# Altium PCB PCB1.PcbDoc
Units mm, origin at the board's own origin, x right, y up, seen from the top; angles counter-clockwise.
Board outline 60 x 25 mm, 5 copper layers (Top Layer, Mid-Layer 4, Mid-Layer 9, Mid-Layer 11, Bottom Layer), stack 2.635 mm thick; 3 components, 2 nets, 435 pads, 0 vias.
Unrouted connection lines stored in the file: 17.
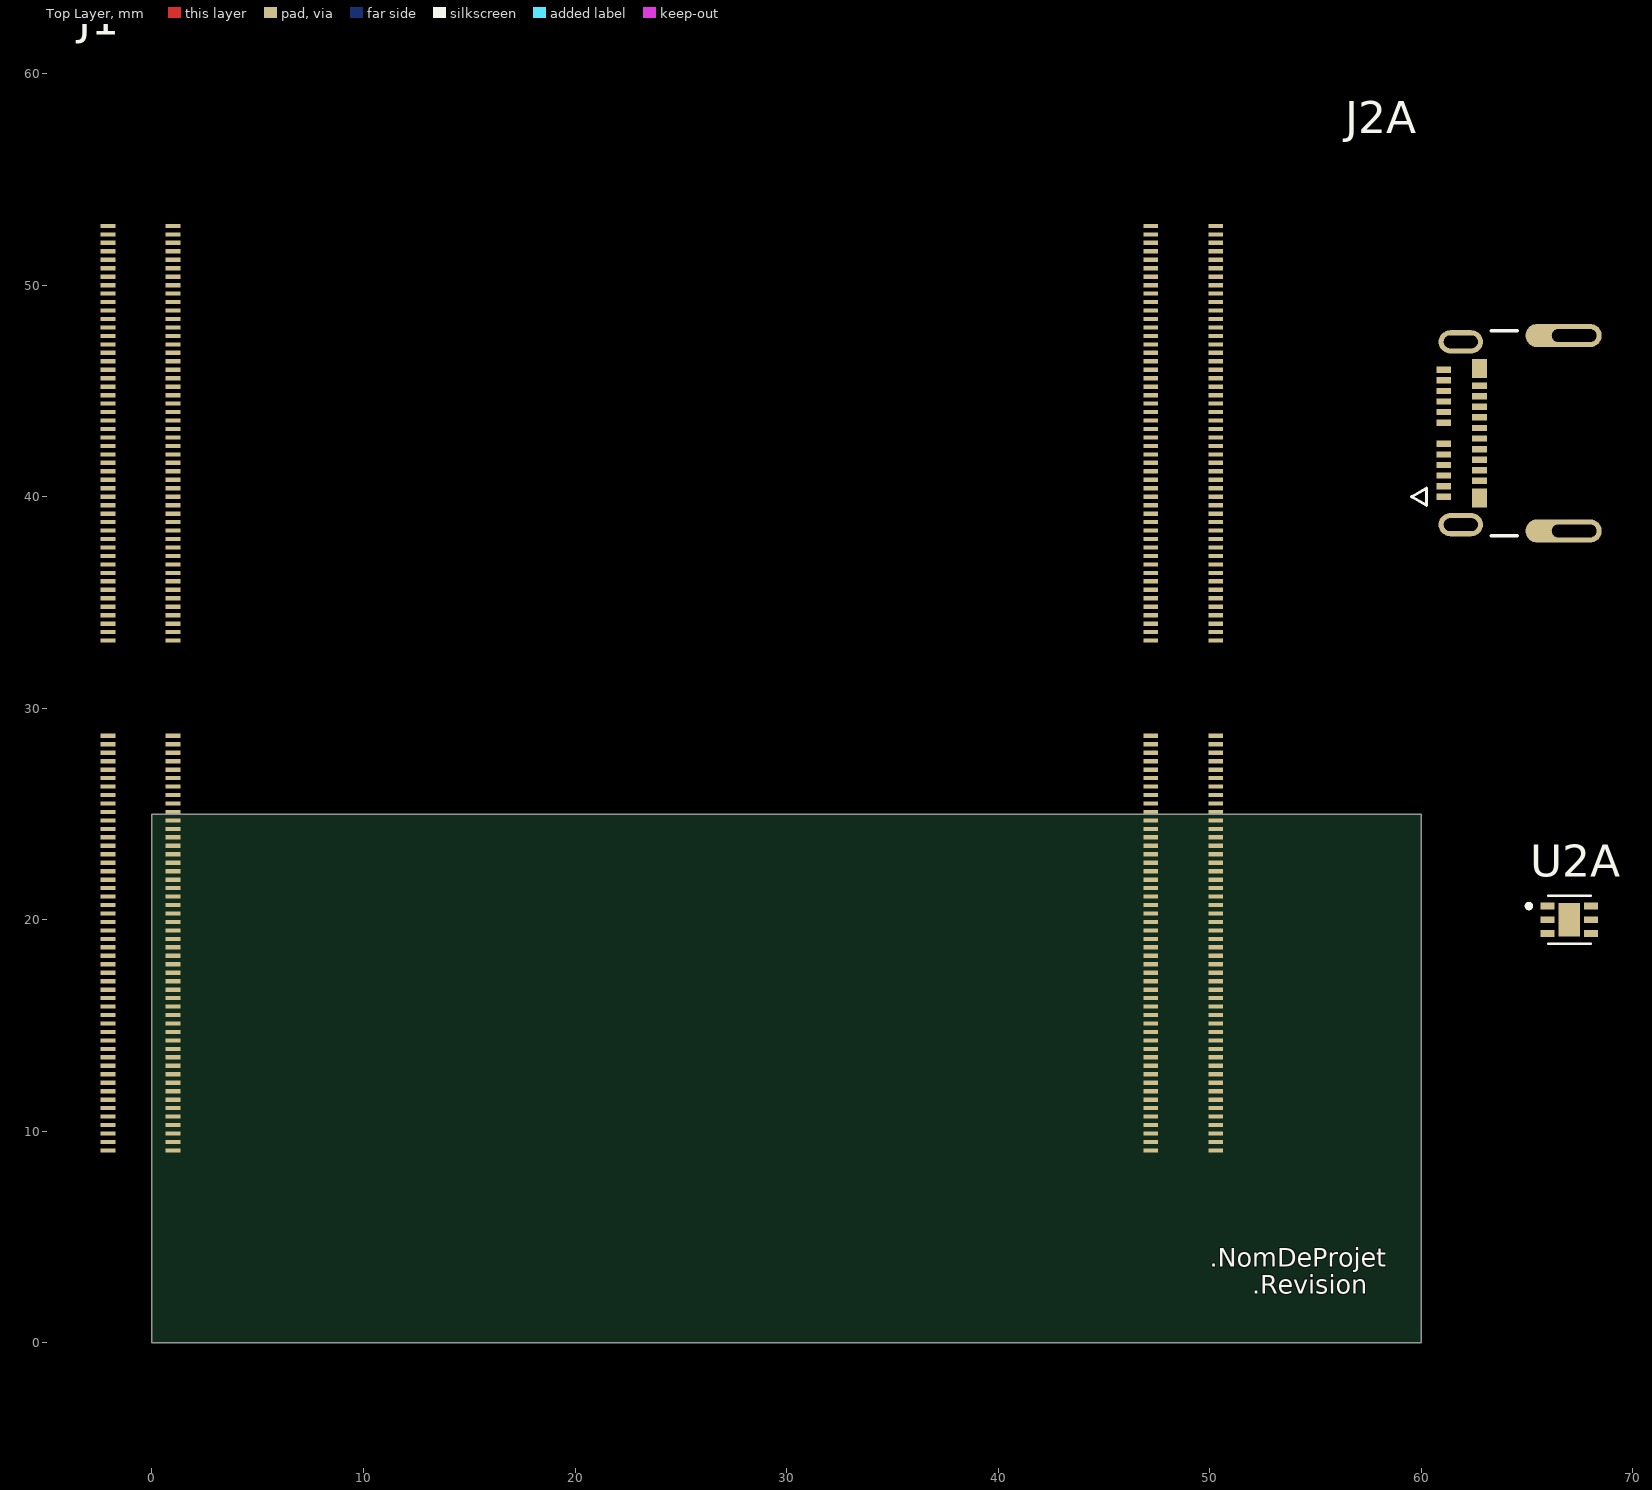
[diagram p0: Top Layer view]
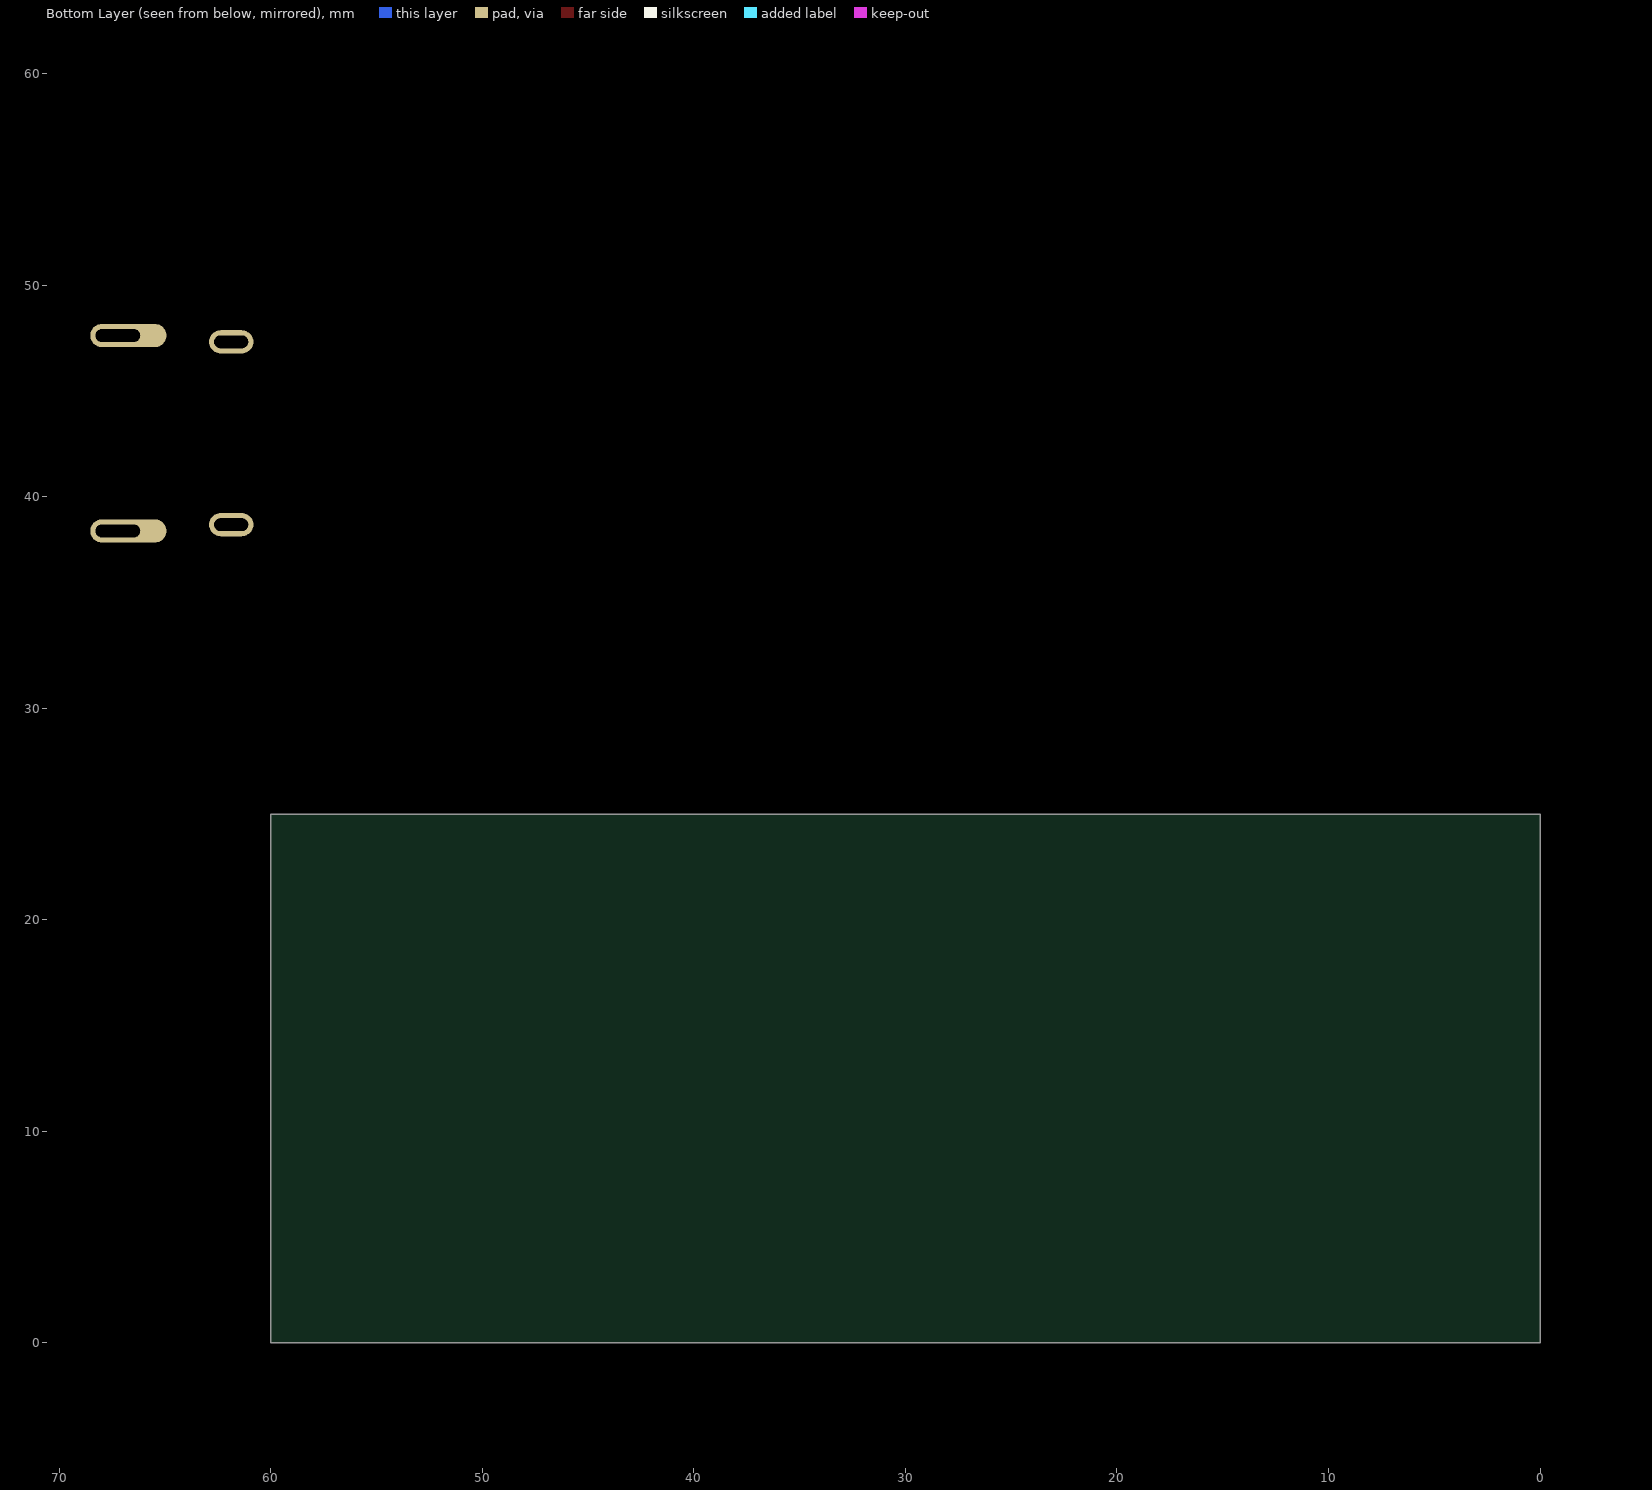
[diagram p1: Bottom Layer view, seen from below]
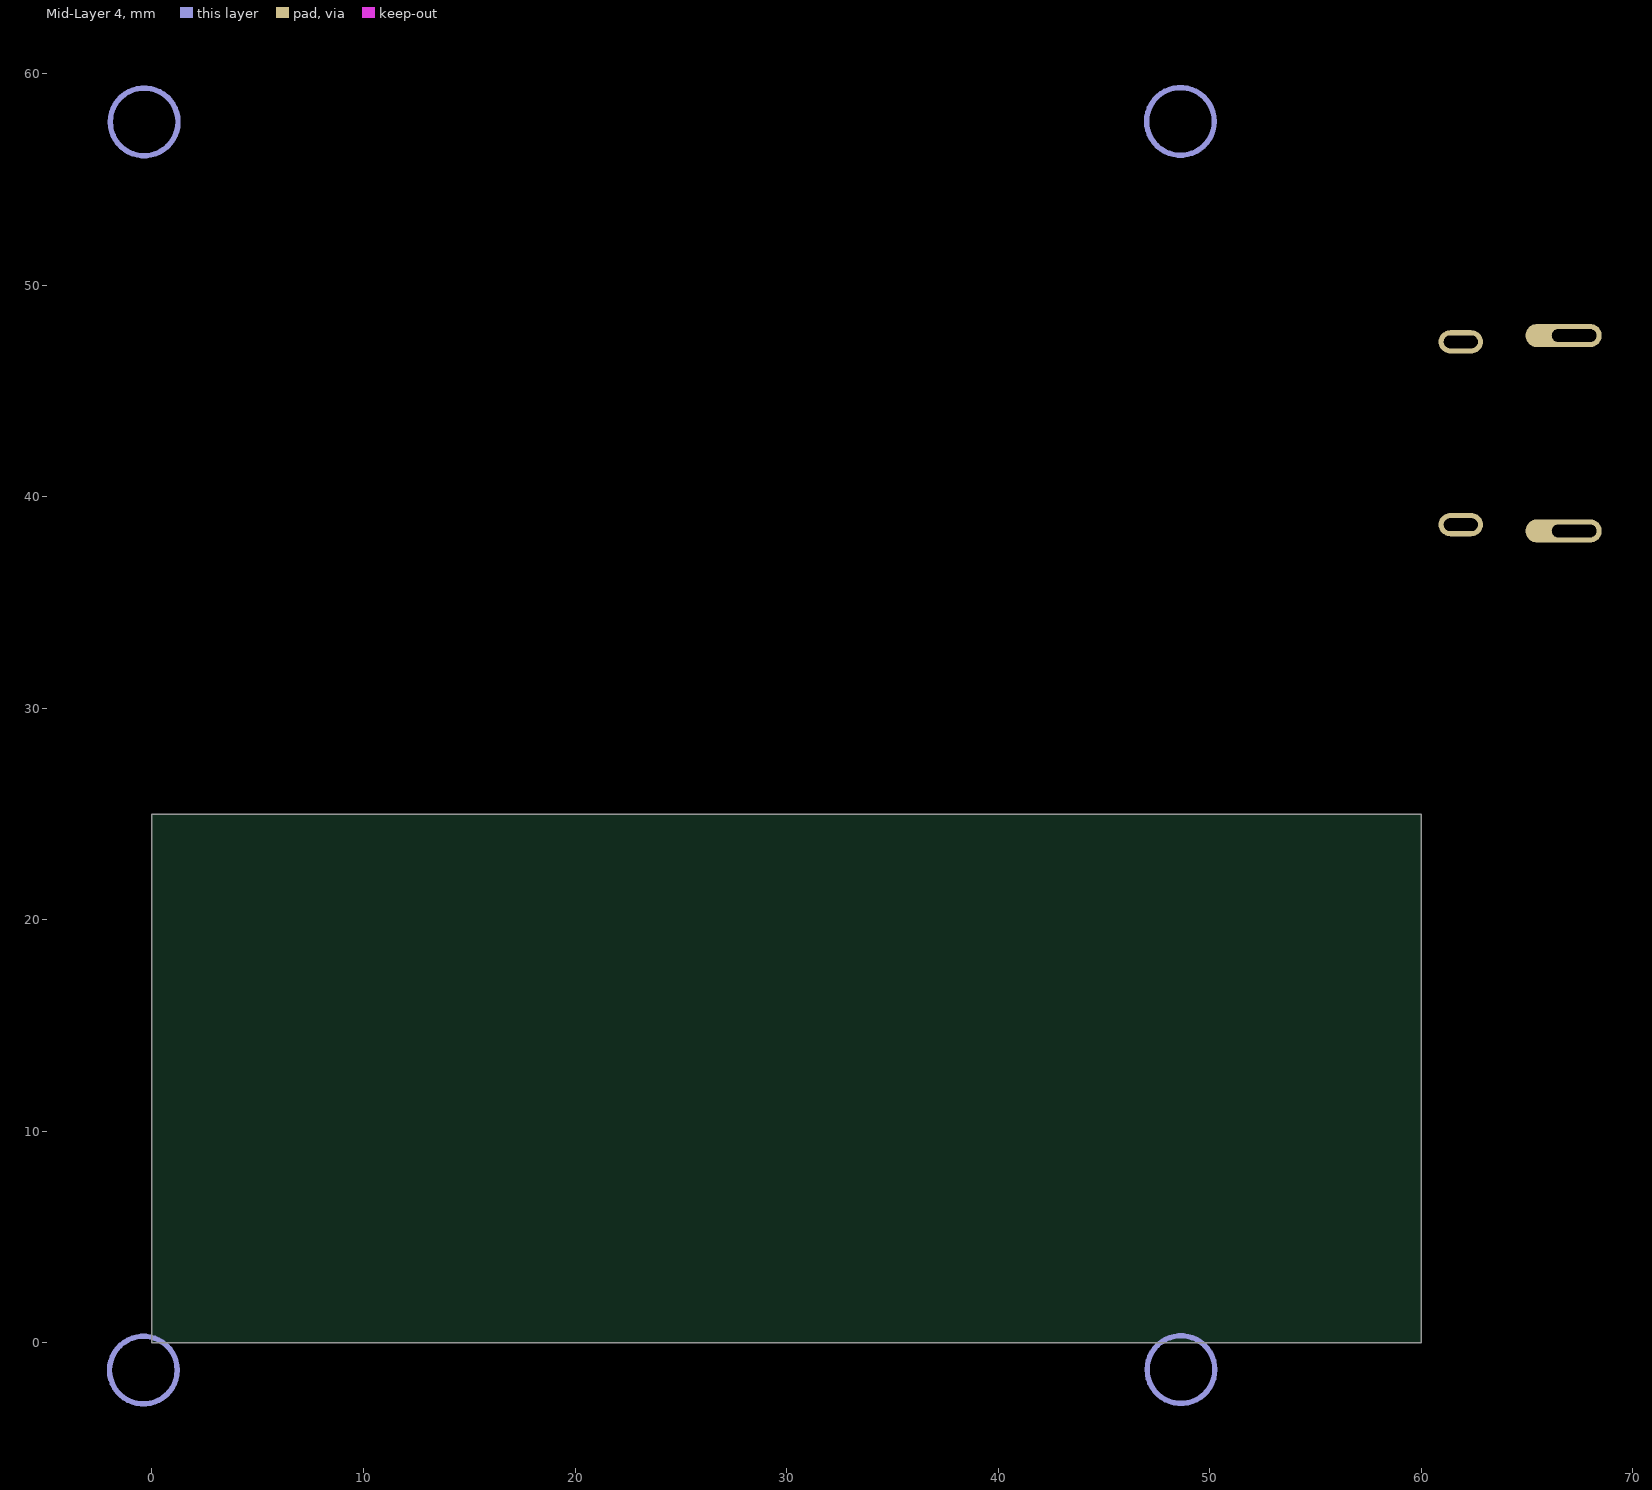
[diagram p2: Mid-Layer 4]
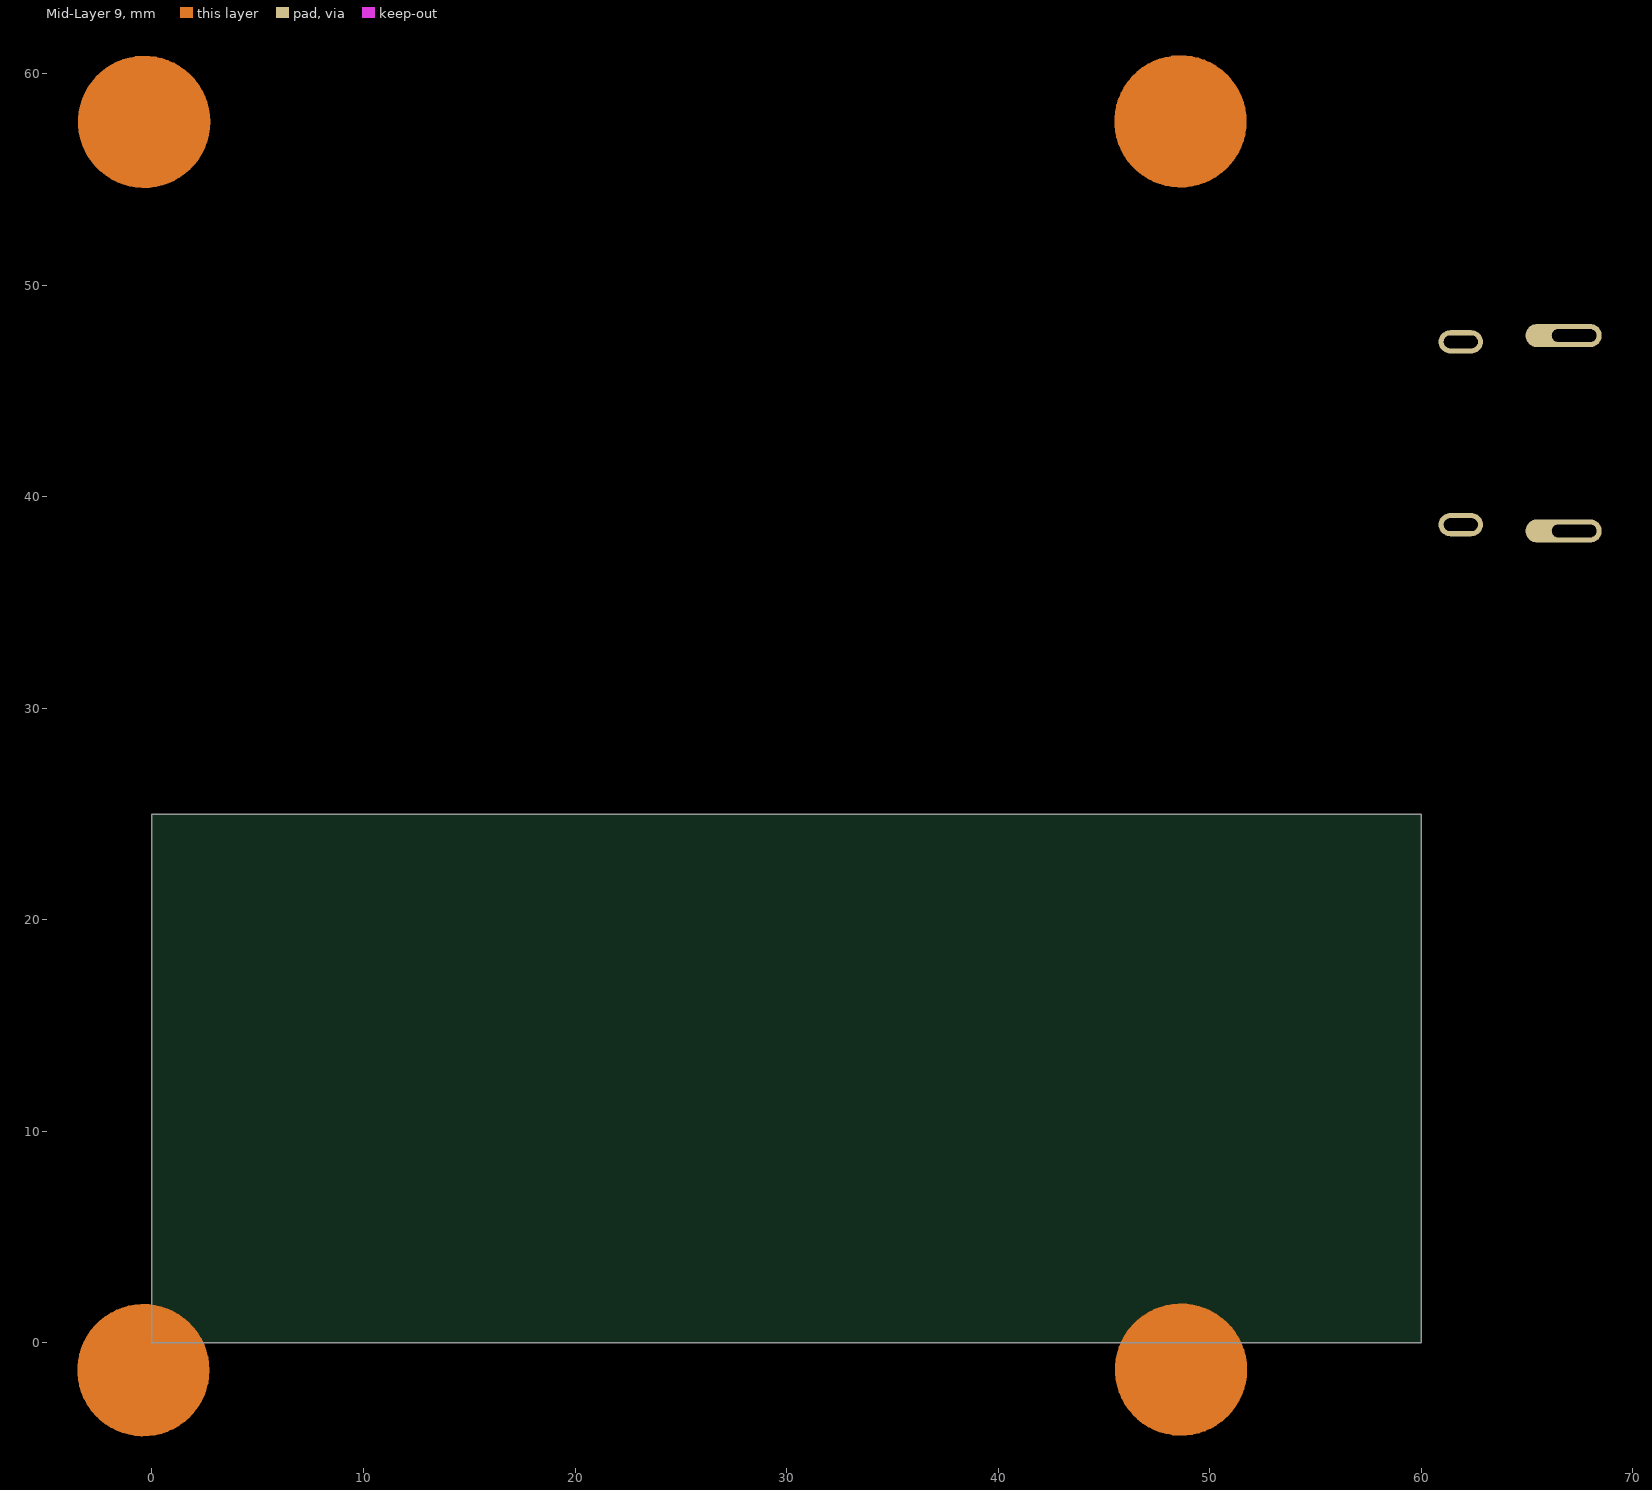
[diagram p3: Mid-Layer 9]
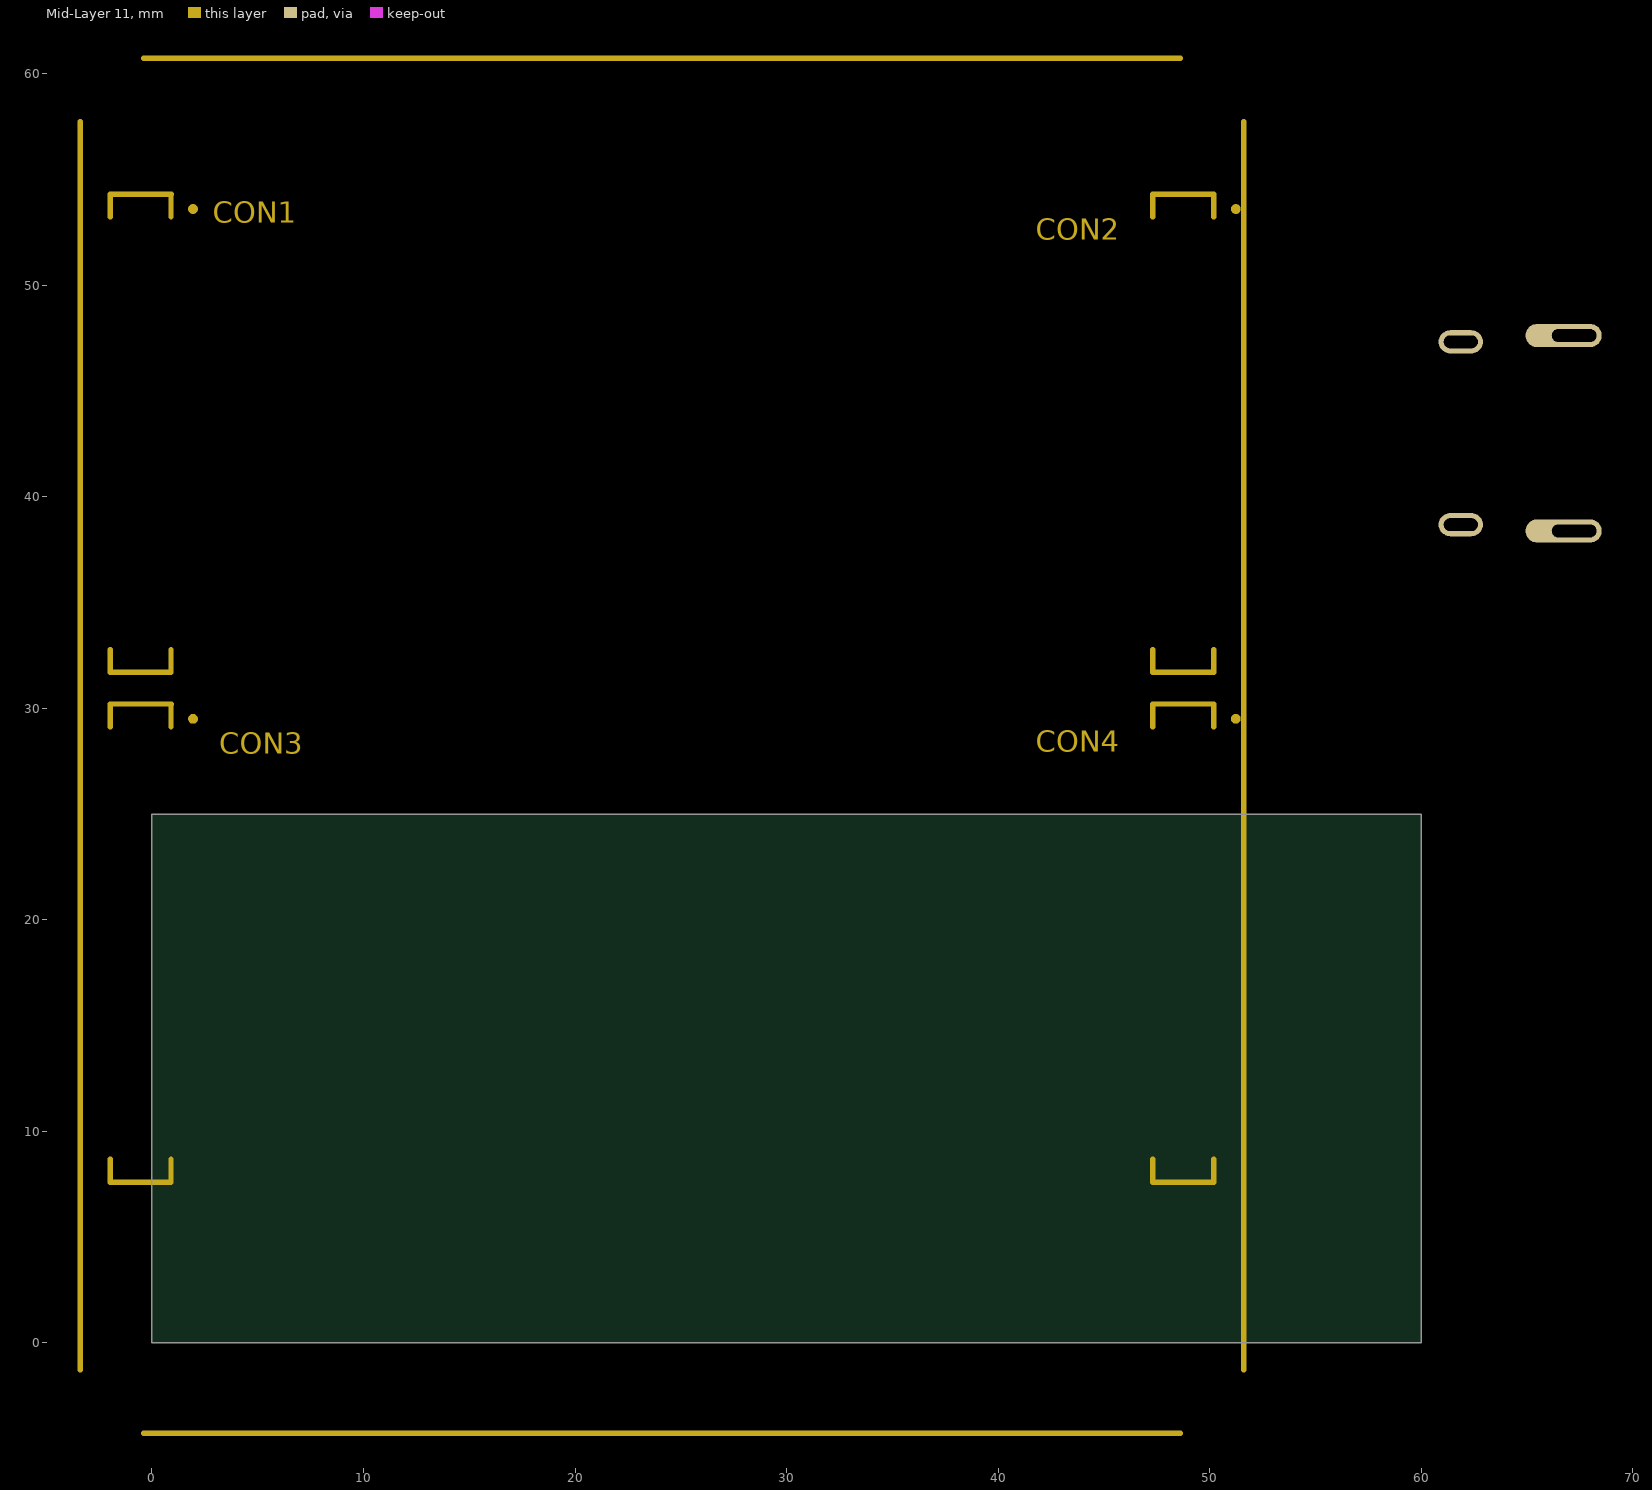
[diagram p4: Mid-Layer 11]

## Layer stack, top to bottom
Top Solder: solder mask 0.0254, SM-001, Dk 4
Top Layer: signal copper 0.035
Dielectric 1: core 1.4986, Core-043, Dk 4.3
Mid-Layer 4: signal copper 0.0356
Dielectric4: dielectric 0.32, FR-4, Dk 4.8
Mid-Layer 9: signal copper 0.0356
Dielectric3: dielectric 0.32, FR-4, Dk 4.8
Mid-Layer 11: signal copper 0.0356
Dielectric2: dielectric 0.32, FR-4, Dk 4.8
Bottom Layer: signal copper 0.035
Bottom Solder: solder mask 0.0254, SM-001, Dk 4

## Board outline
0,0 0,25 60,25 60,0

## Design rules (kind name [scope] priority, off if disabled: settings)
BoardOutlineClearance [All] p1: gap=1 ignorepadtopadclearanceinfootprint=FALSE
Clearance [All] p1: gap=0.2 ignorepadtopadclearanceinfootprint=FALSE
DiffPairsRouting [All] p1: maxlimit=0.125 minlimit=0.125 mostfreqgap=0.125 toplayer_minwidth=0.125 toplayer_maxwidth=0.125 toplayer_prefwidth=0.125 midlayer4_minwidth=0.125 midlayer4_maxwidth=0.125 midlayer4_prefwidth=0.125 midlayer9_minwidth=0.125 midlayer9_maxwidth=0.125 midlayer9_prefwidth=0.125 midlayer11_minwidth=0.125 midlayer11_maxwidth=0.125 midlayer11_prefwidth=0.125 bottomlayer_minwidth=0.125 bottomlayer_maxwidth=0.125 bottomlayer_prefwidth=0.125 maxuncoupledlength=15
HoleSize [All] p1: absolutevalues=TRUE maxlimit=5 minlimit=0.2 maxpercent=80.000 minpercent=20.000
HoleToHoleClearance [All] p1: gap=0.3 allowstackedmicrovias=TRUE
MinimumSolderMaskSliver [All] p1: minsoldermaskwidth=0.075
PlaneClearance [All] p1: clearance=0.5
PlaneConnect [All] p1: pad.planeconnectstyle=Relief pad.reliefexpansion=0.508 pad.reliefentries=4 pad.reliefconductorwidth=0.254 pad.reliefairgap=0.254 via.planeconnectstyle=Direct via.reliefexpansion=0.508 via.reliefentries=4 via.reliefconductorwidth=0.254 via.reliefairgap=0.254
PolygonConnect [All] p1: thpad.connectstyle=Relief thpad.reliefconductorwidth=0.254 thpad.reliefentries=4 thpad.polygonreliefangle="90 Angle" thpad.airgapwidth=0.254 smdpad.connectstyle=Relief smdpad.reliefconductorwidth=0.254 smdpad.reliefentries=4 smdpad.polygonreliefangle="90 Angle" smdpad.airgapwidth=0.254 via.connectstyle=Direct via.reliefconductorwidth=0.254 via.reliefentries=4 via.polygonreliefangle="90 Angle" via.airgapwidth=0.254
RoutingVias [All] p1: holewidth=0.3 width=0.8 viastyle="Through Hole" minholewidth=0.2 minwidth=0.6 maxholewidth=0.7 maxwidth=1.2
SilkToSilkClearance [All] p1: silktosilkclearance=0
SilkToSolderMaskClearance [IsPad] p1: minsilkscreentomaskgap=0 clearancetoexposedcopper=TRUE
SolderMaskExpansion [All] p1: expansion=0.102 istentingtop=FALSE
SupplyNets "Schematic Supply Nets_1" [InNet('GND')] p1: voltage=0.000
SupplyNets "Schematic Supply Nets" [InNet('VCC')] p2: voltage=0.000
Width [All] p1: maxlimit=5 minlimit=0.15 preferedwidth=0.2
22 further rules are at their usual default settings.

## Classes and differential pairs
component class USBC: J2A U2A
component class SYSTEM: J1

## Components (designator, comment, footprint, x,y, rotation, side; value= is the part's Value field where it differs from the comment)
J1 "CM3588 Hirose Connector" CM3588 23.884,30.949 r0 top
J2A "USBC" MOLEX_2012670005 69,43 r90 top
U2A "TVS2200DRVR" SON65P200X200X80-7N 67,20 r0 top

## Footprints (in the part's own frame and the unit in brackets; to place one, negate y for a bottom-side part, rotate by r counter-clockwise, add the part's x,y. Pads: shape width x height; smd on the part's side, far side on the other; paste and mask are expansions set on the pad)
CM3588 [mm]
  rect 0.7x0.2 smd: 1(-22.884,21.851) 2(-25.964,21.851) 3(-22.884,21.451) 4(-25.964,21.451) 5(-22.884,21.051) 6(-25.964,21.051) 7(-22.884,20.651) 8(-25.964,20.651) 9(-22.884,20.251) 10(-25.964,20.251) 11(-22.884,19.851) 12(-25.964,19.851) 13(-22.884,19.451) 14(-25.964,19.451) 15(-22.884,19.051) 16(-25.964,19.051) 17(-22.884,18.651) 18(-25.964,18.651) 19(-22.884,18.251) 20(-25.964,18.251) 21(-22.884,17.851) 22(-25.964,17.851) 23(-22.884,17.451) 24(-25.964,17.451) 25(-22.884,17.051) 26(-25.964,17.051) 27(-22.884,16.651) 28(-25.964,16.651) 29(-22.884,16.251) 30(-25.964,16.251) 31(-22.884,15.851) 32(-25.964,15.851) 33(-22.884,15.451) 34(-25.964,15.451) 35(-22.884,15.051) 36(-25.964,15.051) 37(-22.884,14.651) 38(-25.964,14.651) 39(-22.884,14.251) 40(-25.964,14.251) 41(-22.884,13.851) 42(-25.964,13.851) 43(-22.884,13.451) 44(-25.964,13.451) 45(-22.884,13.051) 46(-25.964,13.051) 47(-22.884,12.651) 48(-25.964,12.651) 49(-22.884,12.251) 50(-25.964,12.251) 51(-22.884,11.851) 52(-25.964,11.851) 53(-22.884,11.451) 54(-25.964,11.451) 55(-22.884,11.051) 56(-25.964,11.051) 57(-22.884,10.651) 58(-25.964,10.651) 59(-22.884,10.251) 60(-25.964,10.251) 61(-22.884,9.851) 62(-25.964,9.851) 63(-22.884,9.451) 64(-25.964,9.451) 65(-22.884,9.051) 66(-25.964,9.051) 67(-22.884,8.651) 68(-25.964,8.651) 69(-22.884,8.251) 70(-25.964,8.251) 71(-22.884,7.851) 72(-25.964,7.851) 73(-22.884,7.451) 74(-25.964,7.451) 75(-22.884,7.051) 76(-25.964,7.051) 77(-22.884,6.651) 78(-25.964,6.651) 79(-22.884,6.251) 80(-25.964,6.251) 81(-22.884,5.851) 82(-25.964,5.851) 83(-22.884,5.451) 84(-25.964,5.451) 85(-22.884,5.051) 86(-25.964,5.051) 87(-22.884,4.651) 88(-25.964,4.651) 89(-22.884,4.251) 90(-25.964,4.251) 91(-22.884,3.851) 92(-25.964,3.851) 93(-22.884,3.451) 94(-25.964,3.451) 95(-22.884,3.051) 96(-25.964,3.051) 97(-22.884,2.651) 98(-25.964,2.651) 99(-22.884,2.251) 100(-25.964,2.251) 101(26.406,21.851) 102(23.326,21.851) 103(26.406,21.451) 104(23.326,21.451) 105(26.406,21.051) 106(23.326,21.051) 107(26.406,20.651) 108(23.326,20.651) 109(26.406,20.251) 110(23.326,20.251) 111(26.406,19.851) 112(23.326,19.851) 113(26.406,19.451) 114(23.326,19.451) 115(26.406,19.051) 116(23.326,19.051) 117(26.406,18.651) 118(23.326,18.651) 119(26.406,18.251) 120(23.326,18.251) 121(26.406,17.851) 122(23.326,17.851) 123(26.406,17.451) 124(23.326,17.451) 125(26.406,17.051) 126(23.326,17.051) 127(26.406,16.651) 128(23.326,16.651) 129(26.406,16.251) 130(23.326,16.251) 131(26.406,15.851) 132(23.326,15.851) 133(26.406,15.451) 134(23.326,15.451) 135(26.406,15.051) 136(23.326,15.051) 137(26.406,14.651) 138(23.326,14.651) 139(26.406,14.251) 140(23.326,14.251) 141(26.406,13.851) 142(23.326,13.851) 143(26.406,13.451) 144(23.326,13.451) 145(26.406,13.051) 146(23.326,13.051) 147(26.406,12.651) 148(23.326,12.651) 149(26.406,12.251) 150(23.326,12.251) 151(26.406,11.851) 152(23.326,11.851) 153(26.406,11.451) 154(23.326,11.451) 155(26.406,11.051) 156(23.326,11.051) 157(26.406,10.651) 158(23.326,10.651) 159(26.406,10.251) 160(23.326,10.251) 161(26.406,9.851) 162(23.326,9.851) 163(26.406,9.451) 164(23.326,9.451) 165(26.406,9.051) 166(23.326,9.051) 167(26.406,8.651) 168(23.326,8.651) 169(26.406,8.251) 170(23.326,8.251) 171(26.406,7.851) 172(23.326,7.851) 173(26.406,7.451) 174(23.326,7.451) 175(26.406,7.051) 176(23.326,7.051) 177(26.406,6.651) 178(23.326,6.651) 179(26.406,6.251) 180(23.326,6.251) 181(26.406,5.851) 182(23.326,5.851) 183(26.406,5.451) 184(23.326,5.451) 185(26.406,5.051) 186(23.326,5.051) 187(26.406,4.651) 188(23.326,4.651) 189(26.406,4.251) 190(23.326,4.251) 191(26.406,3.851) 192(23.326,3.851) 193(26.406,3.451) 194(23.326,3.451) 195(26.406,3.051) 196(23.326,3.051) 197(26.406,2.651) 198(23.326,2.651) 199(26.406,2.251) 200(23.326,2.251) 201(-22.884,-2.251) 202(-25.964,-2.251) 203(-22.884,-2.651) 204(-25.964,-2.651) 205(-22.884,-3.051) 206(-25.964,-3.051) 207(-22.884,-3.451) 208(-25.964,-3.451) 209(-22.884,-3.851) 210(-25.964,-3.851) 211(-22.884,-4.251) 212(-25.964,-4.251) 213(-22.884,-4.651) 214(-25.964,-4.651) 215(-22.884,-5.051) 216(-25.964,-5.051) 217(-22.884,-5.451) 218(-25.964,-5.451) 219(-22.884,-5.851) 220(-25.964,-5.851) 221(-22.884,-6.251) 222(-25.964,-6.251) 223(-22.884,-6.651) 224(-25.964,-6.651) 225(-22.884,-7.051) 226(-25.964,-7.051) 227(-22.884,-7.451) 228(-25.964,-7.451) 229(-22.884,-7.851) 230(-25.964,-7.851) 231(-22.884,-8.251) 232(-25.964,-8.251) 233(-22.884,-8.651) 234(-25.964,-8.651) 235(-22.884,-9.051) 236(-25.964,-9.051) 237(-22.884,-9.451) 238(-25.964,-9.451) 239(-22.884,-9.851) 240(-25.964,-9.851) 241(-22.884,-10.251) 242(-25.964,-10.251) 243(-22.884,-10.651) 244(-25.964,-10.651) 245(-22.884,-11.051) 246(-25.964,-11.051) 247(-22.884,-11.451) 248(-25.964,-11.451) 249(-22.884,-11.851) 250(-25.964,-11.851) 251(-22.884,-12.251) 252(-25.964,-12.251) 253(-22.884,-12.651) 254(-25.964,-12.651) 255(-22.884,-13.051) 256(-25.964,-13.051) 257(-22.884,-13.451) 258(-25.964,-13.451) 259(-22.884,-13.851) 260(-25.964,-13.851) 261(-22.884,-14.251) 262(-25.964,-14.251) 263(-22.884,-14.651) 264(-25.964,-14.651) 265(-22.884,-15.051) 266(-25.964,-15.051) 267(-22.884,-15.451) 268(-25.964,-15.451) 269(-22.884,-15.851) 270(-25.964,-15.851) 271(-22.884,-16.251) 272(-25.964,-16.251) 273(-22.884,-16.651) 274(-25.964,-16.651) 275(-22.884,-17.051) 276(-25.964,-17.051) 277(-22.884,-17.451) 278(-25.964,-17.451) 279(-22.884,-17.851) 280(-25.964,-17.851) 281(-22.884,-18.251) 282(-25.964,-18.251) 283(-22.884,-18.651) 284(-25.964,-18.651) 285(-22.884,-19.051) 286(-25.964,-19.051) 287(-22.884,-19.451) 288(-25.964,-19.451) 289(-22.884,-19.851) 290(-25.964,-19.851) 291(-22.884,-20.251) 292(-25.964,-20.251) 293(-22.884,-20.651) 294(-25.964,-20.651) 295(-22.884,-21.051) 296(-25.964,-21.051) 297(-22.884,-21.451) 298(-25.964,-21.451) 299(-22.884,-21.851) 300(-25.964,-21.851) 301(26.406,-2.251) 302(23.326,-2.251) 303(26.406,-2.651) 304(23.326,-2.651) 305(26.406,-3.051) 306(23.326,-3.051) 307(26.406,-3.451) 308(23.326,-3.451) 309(26.406,-3.851) 310(23.326,-3.851) 311(26.406,-4.251) 312(23.326,-4.251) 313(26.406,-4.651) 314(23.326,-4.651) 315(26.406,-5.051) 316(23.326,-5.051) 317(26.406,-5.451) 318(23.326,-5.451) 319(26.406,-5.851) 320(23.326,-5.851) 321(26.406,-6.251) 322(23.326,-6.251) 323(26.406,-6.651) 324(23.326,-6.651) 325(26.406,-7.051) 326(23.326,-7.051) 327(26.406,-7.451) 328(23.326,-7.451) 329(26.406,-7.851) 330(23.326,-7.851) 331(26.406,-8.251) 332(23.326,-8.251) 333(26.406,-8.651) 334(23.326,-8.651) 335(26.406,-9.051) 336(23.326,-9.051) 337(26.406,-9.451) 338(23.326,-9.451) 339(26.406,-9.851) 340(23.326,-9.851) 341(26.406,-10.251) 342(23.326,-10.251) 343(26.406,-10.651) 344(23.326,-10.651) 345(26.406,-11.051) 346(23.326,-11.051) 347(26.406,-11.451) 348(23.326,-11.451) 349(26.406,-11.851) 350(23.326,-11.851) 351(26.406,-12.251) 352(23.326,-12.251) 353(26.406,-12.651) 354(23.326,-12.651) 355(26.406,-13.051) 356(23.326,-13.051) 357(26.406,-13.451) 358(23.326,-13.451) 359(26.406,-13.851) 360(23.326,-13.851) 361(26.406,-14.251) 362(23.326,-14.251) 363(26.406,-14.651) 364(23.326,-14.651) 365(26.406,-15.051) 366(23.326,-15.051) 367(26.406,-15.451) 368(23.326,-15.451) 369(26.406,-15.851) 370(23.326,-15.851) 371(26.406,-16.251) 372(23.326,-16.251) 373(26.406,-16.651) 374(23.326,-16.651) 375(26.406,-17.051) 376(23.326,-17.051) 377(26.406,-17.451) 378(23.326,-17.451) 379(26.406,-17.851) 380(23.326,-17.851) 381(26.406,-18.251) 382(23.326,-18.251) 383(26.406,-18.651) 384(23.326,-18.651) 385(26.406,-19.051) 386(23.326,-19.051) 387(26.406,-19.451) 388(23.326,-19.451) 389(26.406,-19.851) 390(23.326,-19.851) 391(26.406,-20.251) 392(23.326,-20.251) 393(26.406,-20.651) 394(23.326,-20.651) 395(26.406,-21.051) 396(23.326,-21.051) 397(26.406,-21.451) 398(23.326,-21.451) 399(26.406,-21.851) 400(23.326,-21.851)
  Mid-Layer 4 circle w0.254: c24.758,-32.212 r1.6
  Mid-Layer 4 circle w0.254: c24.733,26.792 r1.6
  Mid-Layer 4 circle w0.254: c-24.255,26.769 r1.6
  Mid-Layer 4 circle w0.254: c-24.289,-32.237 r1.6
  Mid-Layer 9 circle w0.254: c24.758,-32.212 r3
  Mid-Layer 9 circle w0.254: c24.733,26.792 r3
  Mid-Layer 9 circle w0.254: c-24.255,26.769 r3
  Mid-Layer 9 circle w0.254: c-24.289,-32.237 r3
  Mid-Layer 9 region: 25.229,-29.24 25.688,-29.35 26.124,-29.53 26.527,-29.777 26.886,-30.084 27.193,-30.443 27.439,-30.846 27.62,-31.282 27.73,-31.741 27.767,-32.212 27.73,-32.682 27.62,-33.142 27.439,-33.578 27.193,-33.981 26.886,-34.34 26.527,-34.646 26.124,-34.893 25.688,-35.074 25.229,-35.184 24.758,-35.221 24.287,-35.184 23.828,-35.074 23.392,-34.893 22.989,-34.646 22.63,-34.34 22.323,-33.981 22.077,-33.578 21.896,-33.142 21.786,-32.682 21.749,-32.212 21.786,-31.741 21.896,-31.282 22.077,-30.846 22.323,-30.443 22.63,-30.084 22.989,-29.777 23.392,-29.53 23.828,-29.35 24.287,-29.24 24.758,-29.202
  Mid-Layer 9 region: 25.203,29.765 25.662,29.654 26.099,29.474 26.501,29.227 26.86,28.92 27.167,28.561 27.414,28.159 27.595,27.722 27.705,27.263 27.742,26.792 27.705,26.322 27.595,25.863 27.414,25.426 27.167,25.024 26.86,24.665 26.501,24.358 26.099,24.111 25.662,23.93 25.203,23.82 24.733,23.783 24.262,23.82 23.803,23.93 23.366,24.111 22.964,24.358 22.605,24.665 22.298,25.024 22.051,25.426 21.871,25.863 21.76,26.322 21.723,26.792 21.76,27.263 21.871,27.722 22.051,28.159 22.298,28.561 22.605,28.92 22.964,29.227 23.366,29.474 23.803,29.654 24.262,29.765 24.733,29.802
  Mid-Layer 9 region: -23.784,29.741 -23.325,29.631 -22.889,29.45 -22.486,29.203 -22.127,28.896 -21.82,28.537 -21.574,28.135 -21.393,27.698 -21.283,27.239 -21.246,26.769 -21.283,26.298 -21.393,25.839 -21.574,25.402 -21.82,25 -22.127,24.641 -22.486,24.334 -22.889,24.087 -23.325,23.907 -23.784,23.796 -24.255,23.759 -24.726,23.796 -25.185,23.907 -25.621,24.087 -26.024,24.334 -26.383,24.641 -26.69,25 -26.936,25.402 -27.117,25.839 -27.227,26.298 -27.264,26.769 -27.227,27.239 -27.117,27.698 -26.936,28.135 -26.69,28.537 -26.383,28.896 -26.024,29.203 -25.621,29.45 -25.185,29.631 -24.726,29.741 -24.255,29.778
  Mid-Layer 9 region: -23.819,-29.265 -23.36,-29.375 -22.923,-29.556 -22.521,-29.803 -22.162,-30.109 -21.855,-30.468 -21.608,-30.871 -21.427,-31.307 -21.317,-31.766 -21.28,-32.237 -21.317,-32.708 -21.427,-33.167 -21.608,-33.603 -21.855,-34.006 -22.162,-34.365 -22.521,-34.672 -22.923,-34.918 -23.36,-35.099 -23.819,-35.209 -24.289,-35.246 -24.76,-35.209 -25.219,-35.099 -25.656,-34.918 -26.058,-34.672 -26.417,-34.365 -26.724,-34.006 -26.971,-33.603 -27.151,-33.167 -27.262,-32.708 -27.299,-32.237 -27.262,-31.766 -27.151,-31.307 -26.971,-30.871 -26.724,-30.468 -26.417,-30.109 -26.058,-29.803 -25.656,-29.556 -25.219,-29.375 -24.76,-29.265 -24.289,-29.228
  Mid-Layer 11 circle w0.254: c27.346,-1.451 r0.1
  Mid-Layer 11 circle w0.254: c27.346,22.651 r0.1
  Mid-Layer 11 circle w0.254: c-21.944,-1.451 r0.1
  Mid-Layer 11 circle w0.254: c-21.944,22.651 r0.1
  Mid-Layer 11 lines w0.254: -27.27,-32.223 -27.27,26.78 ; -25.864,-22.271 -25.864,-23.351 -22.984,-23.351 -22.984,-22.271 ; -25.864,-1.831 -25.864,-0.751 -22.984,-0.751 -22.984,-1.831 ; -25.864,1.831 -25.864,0.751 -22.984,0.751 -22.984,1.831 ; -25.864,22.271 -25.864,23.351 -22.984,23.351 -22.984,22.271 ; -24.272,-35.221 24.732,-35.221 ; -24.27,29.78 17.784,29.78 ; -22.972,-0.757 -22.972,-0.747 ; -22.972,23.343 -22.972,23.353 ; 17.785,29.781 24.731,29.781 ; 23.426,-22.271 23.426,-23.351 26.306,-23.351 26.306,-22.271 ; 23.426,-1.831 23.426,-0.751 26.306,-0.751 26.306,-1.831 ; 23.426,1.831 23.426,0.751 26.306,0.751 26.306,1.831 ; 23.426,22.271 23.426,23.351 26.306,23.351 26.306,22.271 ; 26.318,-0.758 26.318,-0.748 ; 26.32,23.342 26.32,23.352 ; 27.731,-32.222 27.731,26.782
MOLEX_2012670005 [mm]
  rect 0.298x0.7 smd mask+0.064: A1(-3,7.94) A2(-2.5,7.94) A3(-2,7.94) A4(-1.5,7.94) A5(-1,7.94) A6(-0.5,7.94) A7(0.5,7.94) A8(1,7.94) A9(1.5,7.94) A10(2,7.94) A11(2.5,7.94) A12(3,7.94) B2(2.25,6.24) B3(1.75,6.24) B4(1.25,6.24) B5(0.75,6.24) B6(0.25,6.24) B7(-0.25,6.24) B8(-0.75,6.24) B9(-1.25,6.24) B10(-1.75,6.24) B11(-2.25,6.24)
  rect 0.898x0.7 smd mask+0: B1(3.05,6.24) B12(-3.05,6.24)
  oval 1.1x2.1 hole 0.6 slot 1.6 at 90 deg mask+0.064: SH1(-4.32,7.13) SH2(4.32,7.13)
  oval 1.1x3.6 hole 0.6 slot 2.1 at 90 deg copper offset 0,0.5 mask+0.064: SH3(-4.62,1.77) SH4(4.62,1.77)
  silkscreen extent -4.84,4.45 4.84,9.45
SON65P200X200X80-7N [mm]
  rect 0.66x0.32 smd: 1(-1.025,0.65) 2(-1.025,0) 3(-1.025,-0.65) 4(1.025,-0.65) 5(1.025,0) 6(1.025,0.65)
  rect 1x1.6 smd paste-2: 7(0,0)
  silkscreen extent -2.01,-1.13 1,1.13, body extent -1,-1 1,1, height 0.8

## Part data
J1: library part CM3588, LCSC=C597931
J2A: "USB-C (USB TYPE-C) USB 3.2 Gen 2 (USB 3.1 Gen 2, Superspeed + (USB 3.1)) Receptacle Connector 24 Position Surface Mount, Right Angle; Through Hole", Package=None, Check_prices=https://www.snapeda.com/parts/2012670005/Molex/view-part/?ref=eda, MF=Molex, MP=2012670005, SnapEDA_Link=https://www.snapeda.com/parts/2012670005/Molex/view-part/?ref=snap
U2A: "22V flat-clamp surge protection device", Package="WSON-6 Texas Instruments", Check_prices=https://www.snapeda.com/parts/TVS2200DRVR/Texas+Instruments/view-part/?ref=eda, MF="Texas Instruments", MP=TVS2200DRVR, SnapEDA_Link=https://www.snapeda.com/parts/TVS2200DRVR/Texas+Instruments/view-part/?ref=snap

## Nets (pads, with @x,y where several pads share a name; then routed paths per layer and width w, separated by ;. In a path a pad name is that pad's centre, name@x,y a point inside that pad or via, vN(x,y) a via of type N, cw(c..) or ccw(c..) an arc to the next point about the centre after c; other vN are vias at no path point)
GND: J2A.A1 J2A.A12 J2A.B1 J2A.B12 J2A.SH1 J2A.SH2 J2A.SH3 J2A.SH4 U2A.1 U2A.2 U2A.3 U2A.7
VCC: J2A.A4 J2A.A9 J2A.B4 J2A.B9 U2A.4 U2A.5 U2A.6
pads on no net: J1.1 J1.2 J1.3 J1.4 J1.5 J1.6 J1.7 J1.8 J1.9 J1.10 J1.11 J1.12 J1.13 J1.14 J1.15 J1.16 J1.17 J1.18 J1.19 J1.20 J1.21 J1.22 J1.23 J1.24 J1.25 J1.26 J1.27 J1.28 J1.29 J1.30 J1.31 J1.32 J1.33 J1.34 J1.35 J1.36 J1.37 J1.38 J1.39 J1.40 J1.41 J1.42 J1.43 J1.44 J1.45 J1.46 J1.47 J1.48 J1.49 J1.50 J1.51 J1.52 J1.53 J1.54 J1.55 J1.56 J1.57 J1.58 J1.59 J1.60 J1.61 J1.62 J1.63 J1.64 J1.65 J1.66 J1.67 J1.68 J1.69 J1.70 J1.71 J1.72 J1.73 J1.74 J1.75 J1.76 J1.77 J1.78 J1.79 J1.80 J1.81 J1.82 J1.83 J1.84 J1.85 J1.86 J1.87 J1.88 J1.89 J1.90 J1.91 J1.92 J1.93 J1.94 J1.95 J1.96 J1.97 J1.98 J1.99 J1.100 J1.101 J1.102 J1.103 J1.104 J1.105 J1.106 J1.107 J1.108 J1.109 J1.110 J1.111 J1.112 J1.113 J1.114 J1.115 J1.116 J1.117 J1.118 J1.119 J1.120 J1.121 J1.122 J1.123 J1.124 J1.125 J1.126 J1.127 J1.128 J1.129 J1.130 J1.131 J1.132 J1.133 J1.134 J1.135 J1.136 J1.137 J1.138 J1.139 J1.140 J1.141 J1.142 J1.143 J1.144 J1.145 J1.146 J1.147 J1.148 J1.149 J1.150 J1.151 J1.152 J1.153 J1.154 J1.155 J1.156 J1.157 J1.158 J1.159 J1.160 J1.161 J1.162 J1.163 J1.164 J1.165 J1.166 J1.167 J1.168 J1.169 J1.170 J1.171 J1.172 J1.173 J1.174 J1.175 J1.176 J1.177 J1.178 J1.179 J1.180 J1.181 J1.182 J1.183 J1.184 J1.185 J1.186 J1.187 J1.188 J1.189 J1.190 J1.191 J1.192 J1.193 J1.194 J1.195 J1.196 J1.197 J1.198 J1.199 J1.200 J1.201 J1.202 J1.203 J1.204 J1.205 J1.206 J1.207 J1.208 J1.209 J1.210 J1.211 J1.212 J1.213 J1.214 J1.215 J1.216 J1.217 J1.218 J1.219 J1.220 J1.221 J1.222 J1.223 J1.224 J1.225 J1.226 J1.227 J1.228 J1.229 J1.230 J1.231 J1.232 J1.233 J1.234 J1.235 J1.236 J1.237 J1.238 J1.239 J1.240 J1.241 J1.242 J1.243 J1.244 J1.245 J1.246 J1.247 J1.248 J1.249 J1.250 J1.251 J1.252 J1.253 J1.254 J1.255 J1.256 J1.257 J1.258 J1.259 J1.260 J1.261 J1.262 J1.263 J1.264 J1.265 J1.266 J1.267 J1.268 J1.269 J1.270 J1.271 J1.272 J1.273 J1.274 J1.275 J1.276 J1.277 J1.278 J1.279 J1.280 J1.281 J1.282 J1.283 J1.284 J1.285 J1.286 J1.287 J1.288 J1.289 J1.290 J1.291 J1.292 J1.293 J1.294 J1.295 J1.296 J1.297 J1.298 J1.299 J1.300 J1.301 J1.302 J1.303 J1.304 J1.305 J1.306 J1.307 J1.308 J1.309 J1.310 J1.311 J1.312 J1.313 J1.314 J1.315 J1.316 J1.317 J1.318 J1.319 J1.320 J1.321 J1.322 J1.323 J1.324 J1.325 J1.326 J1.327 J1.328 J1.329 J1.330 J1.331 J1.332 J1.333 J1.334 J1.335 J1.336 J1.337 J1.338 J1.339 J1.340 J1.341 J1.342 J1.343 J1.344 J1.345 J1.346 J1.347 J1.348 J1.349 J1.350 J1.351 J1.352 J1.353 J1.354 J1.355 J1.356 J1.357 J1.358 J1.359 J1.360 J1.361 J1.362 J1.363 J1.364 J1.365 J1.366 J1.367 J1.368 J1.369 J1.370 J1.371 J1.372 J1.373 J1.374 J1.375 J1.376 J1.377 J1.378 J1.379 J1.380 J1.381 J1.382 J1.383 J1.384 J1.385 J1.386 J1.387 J1.388 J1.389 J1.390 J1.391 J1.392 J1.393 J1.394 J1.395 J1.396 J1.397 J1.398 J1.399 J1.400 J2A.A2 J2A.A3 J2A.A5 J2A.A6 J2A.A7 J2A.A8 J2A.A10 J2A.A11 J2A.B2 J2A.B3 J2A.B5 J2A.B6 J2A.B7 J2A.B8 J2A.B10 J2A.B11

## Silkscreen, mask and mechanical layers (free items; w line width, h text height)
Top Overlay:
  text ".NomDeProjet" at 50,3.282 h1.5
  text ".Revision" at 52,2.017 h1.5
Board:
  lines w0.2: 0,0 0,25 35,25 60,25 60,0 0,0
Drill Drawing:
  circle w0.254: c5.066,-5.409 r0.69
  lines w0.25: 3.125,-10.133 94.792,-10.133 ; 3.125,-3.927 94.792,-3.927 ; 11.106,-13.236 11.106,-0.824 ; 17.174,-13.236 17.174,-0.824 ; 30.863,-13.236 30.863,-0.824 ; 37.052,-13.236 37.052,-0.824 ; 46.063,-13.236 46.063,-0.824 ; 63.125,-13.236 63.125,-0.824 ; 70.509,-13.236 70.509,-0.824 ; 73.125,1.267 79.401,1.267 95.409,1.267 104.367,1.267 111.489,1.267 ; 73.125,4.267 79.401,4.267 95.409,4.267 104.367,4.267 111.489,4.267 ; 73.125,7.267 79.401,7.267 95.409,7.267 104.367,7.267 111.489,7.267 ; 73.125,10.267 79.401,10.267 95.409,10.267 104.367,10.267 111.489,10.267 ; 73.125,13.267 79.401,13.267 95.409,13.267 104.367,13.267 111.489,13.267 ; 73.125,16.267 79.401,16.267 95.409,16.267 104.367,16.267 111.489,16.267 ; 73.125,19.267 79.401,19.267 95.409,19.267 104.367,19.267 111.489,19.267 ; 73.125,22.267 79.401,22.267 95.409,22.267 104.367,22.267 111.489,22.267 ; 73.125,25.267 79.401,25.267 95.409,25.267 104.367,25.267 111.489,25.267 ; 73.125,28.267 79.401,28.267 95.409,28.267 104.367,28.267 111.489,28.267 ; 73.125,31.267 79.401,31.267 95.409,31.267 104.367,31.267 111.489,31.267 ; 73.125,34.267 79.401,34.267 95.409,34.267 104.367,34.267 111.489,34.267 ; 73.125,37.267 79.401,37.267 95.409,37.267 104.367,37.267 111.489,37.267 ; 73.125,40.267 79.401,40.267 95.409,40.267 104.367,40.267 111.489,40.267 ; 73.125,43.267 111.489,43.267 ; 79.401,46.267 79.401,-1.733 ; 80.155,-13.236 80.155,-0.824 ; 95.409,46.267 95.409,-1.733 ; 104.367,46.267 104.367,-1.733 ; 79.401,-1.733 73.125,-1.733 73.125,46.267 111.489,46.267 111.489,-1.733 104.367,-1.733 ; 79.401,-1.733 95.409,-1.733 ; 95.409,-1.733 104.367,-1.733 ; 3.125,-13.236 94.792,-13.236 94.792,-0.824 3.125,-0.824 3.125,-13.236
  lines w0.254: 4.377,-9.202 5.756,-9.202 5.756,-7.823 4.377,-7.823 4.377,-9.202
  text "Layer" at 74.625,44.017 h1.5
  text "Name" at 80.901,44.017 h1.5
  text "Thickness" at 96.909,44.017 h1.5
  text "Gerber" at 105.867,44.017 h1.5
  text "Top Overlay" at 80.901,41.017 h1.5
  text "GTO" at 105.867,41.017 h1.5
  text "Top Solder" at 80.901,38.017 h1.5
  text "0.025mm" at 96.909,38.017 h1.5
  text "GTS" at 105.867,38.017 h1.5
  text "Top Surface Finish" at 80.901,35.017 h1.5
  text "0.020mm" at 96.909,35.017 h1.5
  text "1" at 74.625,32.017 h1.5
  text "Top Layer" at 80.901,32.017 h1.5
  text "0.035mm" at 96.909,32.017 h1.5
  text "GTL" at 105.867,32.017 h1.5
  text "Dielectric 1" at 80.901,29.017 h1.5
  text "1.499mm" at 96.909,29.017 h1.5
  text "2" at 74.624,26.017 h1.5
  text "Mid-Layer 4" at 80.901,26.017 h1.5
  text "0.036mm" at 96.909,26.017 h1.5
  text "G1" at 105.867,26.017 h1.5
  text "Dielectric4" at 80.901,23.017 h1.5
  text "0.320mm" at 96.909,23.017 h1.5
  text "3" at 74.625,20.017 h1.5
  text "Mid-Layer 9" at 80.901,20.017 h1.5
  text "0.036mm" at 96.909,20.017 h1.5
  text "G2" at 105.867,20.017 h1.5
  text "Dielectric3" at 80.901,17.017 h1.5
  text "0.320mm" at 96.909,17.017 h1.5
  text "4" at 74.625,14.017 h1.5
  text "Mid-Layer 11" at 80.901,14.017 h1.5
  text "0.036mm" at 96.909,14.017 h1.5
  text "G3" at 105.867,14.017 h1.5
  text "Dielectric2" at 80.901,11.017 h1.5
  text "0.320mm" at 96.909,11.017 h1.5
  text "5" at 74.625,8.017 h1.5
  text "Bottom Layer" at 80.901,8.017 h1.5
  text "0.035mm" at 96.909,8.017 h1.5
  text "GBL" at 105.867,8.017 h1.5
  text "Bottom Surface Finish" at 80.901,5.017 h1.5
  text "0.020mm" at 96.909,5.017 h1.5
  text "Bottom Solder" at 80.901,2.017 h1.5
  text "0.025mm" at 96.909,2.017 h1.5
  text "GBS" at 105.867,2.017 h1.5
  text "Bottom Overlay" at 80.901,-0.983 h1.5
  text "GBO" at 105.867,-0.983 h1.5
  text "Symbol" at 4.987,-2.996 h1.8
  text "Count" at 12.037,-2.996 h1.8
  text "Hole Size" at 18.105,-2.996 h1.8
  text "Plated" at 31.794,-2.996 h1.8
  text "Hole Type" at 37.983,-2.996 h1.8
  text "Drill Layer Pair" at 46.994,-2.996 h1.8
  text "Via/Pad" at 64.056,-2.996 h1.8
  text "Pad Shape" at 71.44,-2.996 h1.8
  text "Hole Length" at 81.086,-2.996 h1.8
  text "Total board thickness:" at 74.625,-3.983 h1.5
  text "2.726mm" at 96.908,-3.983 h1.5
  text "2" at 12.037,-6.099 h1.5
  text "0.600mm (23.62mil)" at 18.105,-6.099 h1.5
  text "PTH" at 31.794,-6.099 h1.5
  text "Slot" at 37.983,-6.099 h1.5
  text "Top Layer - Bottom Layer" at 46.994,-6.099 h1.5
  text "Pad" at 64.056,-6.099 h1.5
  text "Rounded" at 71.44,-6.099 h1.5
  text "1.600mm (62.99mil)" at 81.086,-6.099 h1.5
  text "2" at 12.037,-9.202 h1.5
  text "0.600mm (23.62mil)" at 18.105,-9.202 h1.5
  text "PTH" at 31.794,-9.202 h1.5
  text "Slot" at 37.983,-9.202 h1.5
  text "Top Layer - Bottom Layer" at 46.994,-9.202 h1.5
  text "Pad" at 64.056,-9.202 h1.5
  text "Rounded" at 71.44,-9.202 h1.5
  text "2.100mm (82.68mil)" at 81.086,-9.202 h1.5
  text "4 Total" at 12.037,-12.305 h1.5
  text "Slot definitions :" at 4.987,-14.477 h1.5
  text "Routed Path Length" at 15.212,-14.477 h1.5
  text "= Calculated from tool start centre position to tool end centre position." at 27.88,-14.477 h1.5
  text "Hole Length" at 15.212,-15.718 h1.5
  text "= Routed Path Length + Tool Size = Slot length as defined in the PCB layout" at 23.177,-15.718 h1.5

## Dimensions
0,25 to 60,25 on Drill Drawing
0,0 to 0,25 on Drill Drawing

## Text inside footprints (layer, text, board x,y; h text height)
J1: Mid-Layer 11 "CON1" at 2.884,52.949 h1; Mid-Layer 11 "CON2" at 41.784,52.149 h1; Mid-Layer 11 "CON3" at 3.184,27.849 h1; Mid-Layer 11 "CON4" at 41.784,27.949 h1
J2A: Mechanical 12 "PTH Slot 1.6 +/- 0.05 X 0.6 +/- 0.05" at 56.773,37.92 h0.5 r90; Mechanical 12 "PTH Slot 2.1 +/- 0.05 X 0.6 +/- 0.05" at 57.408,37.92 h0.5 r90; Mechanical 13 "PCB Edge" at 68.73,48.5 h1 r90